# Altium PCB PCB_RAM.PcbDoc
Units mil, origin at the board's own origin, x right, y up, seen from the top; angles counter-clockwise.
Board outline 3440 x 3440 mil, 4 copper layers (Top Signal, PWR, GND, Bottom Signal), stack 23.756 mil thick; 16 components, 94 nets, 32 pads, 4 vias.
Unrouted connection lines stored in the file: 29.
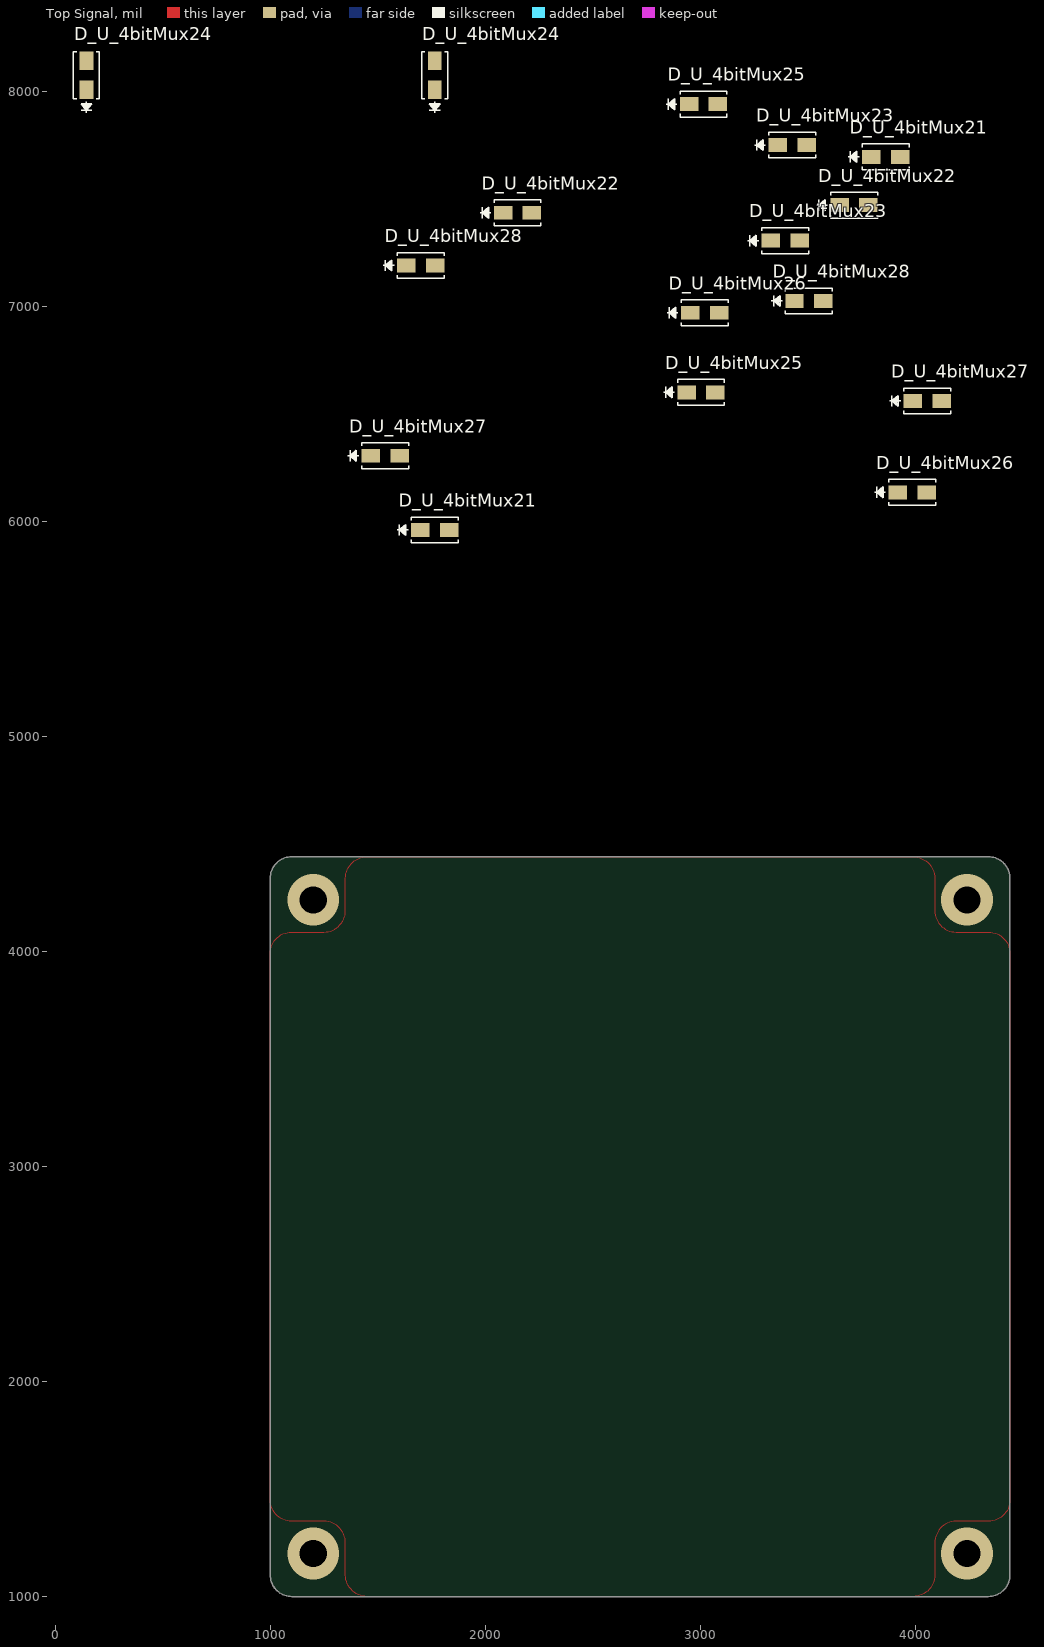
[diagram p0: Top Signal view]
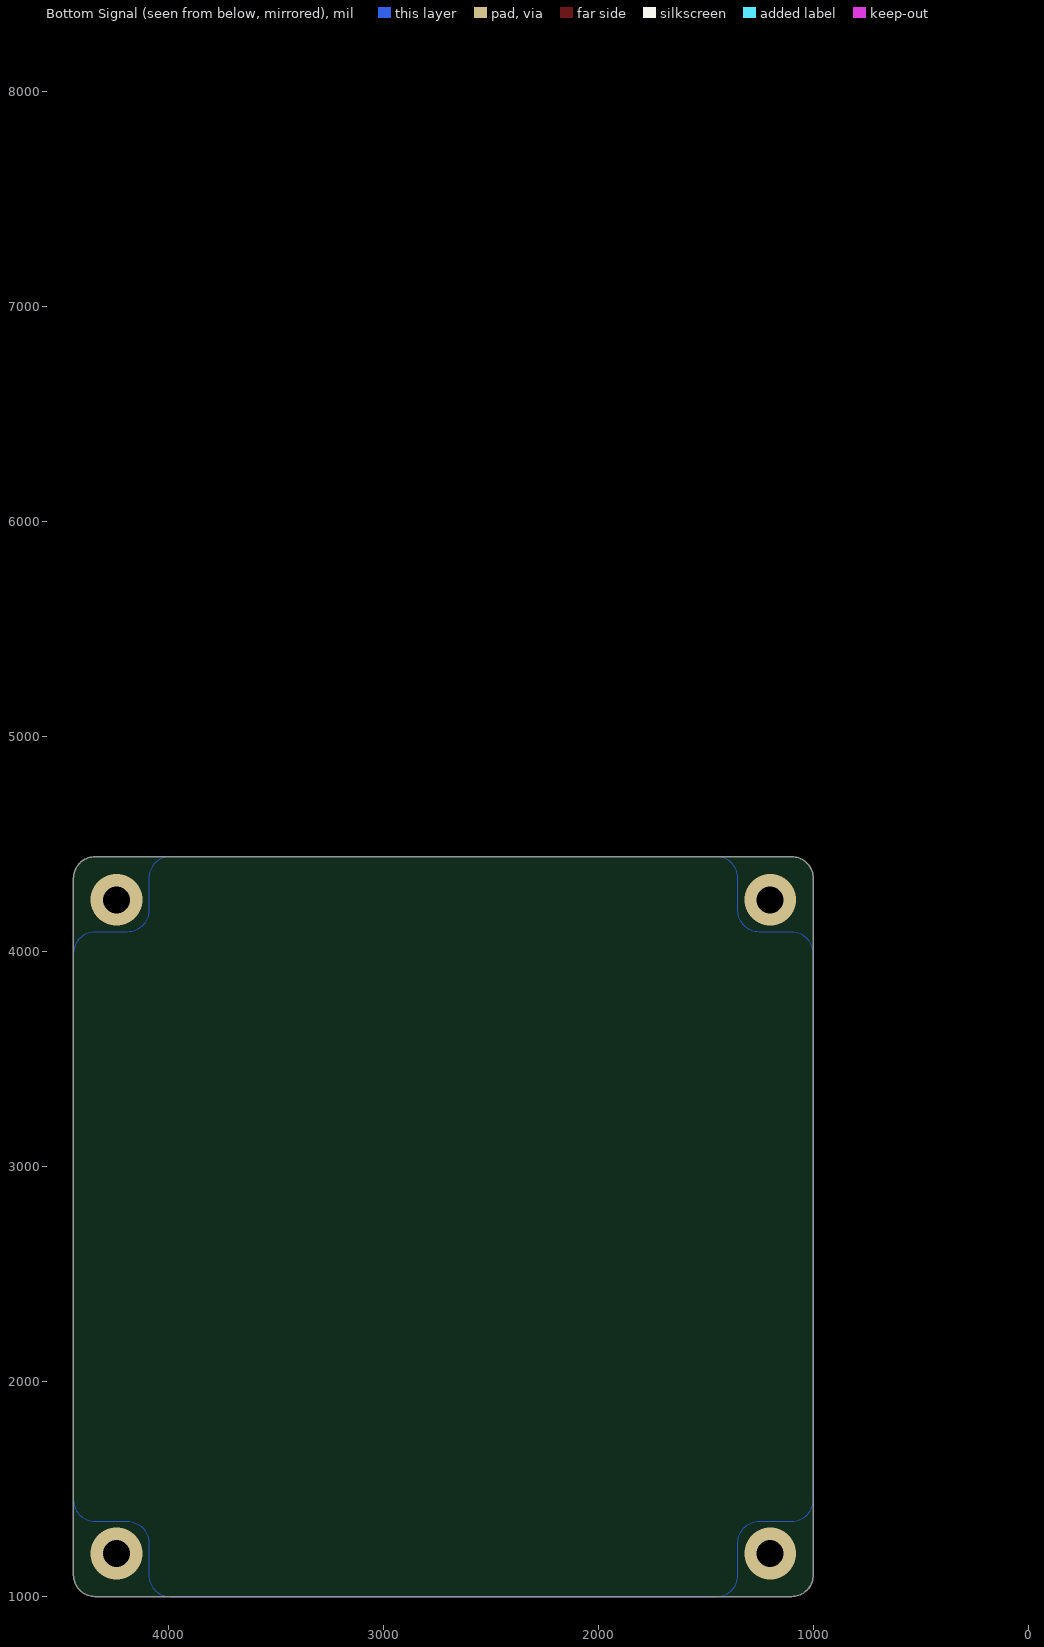
[diagram p1: Bottom Signal view, seen from below]
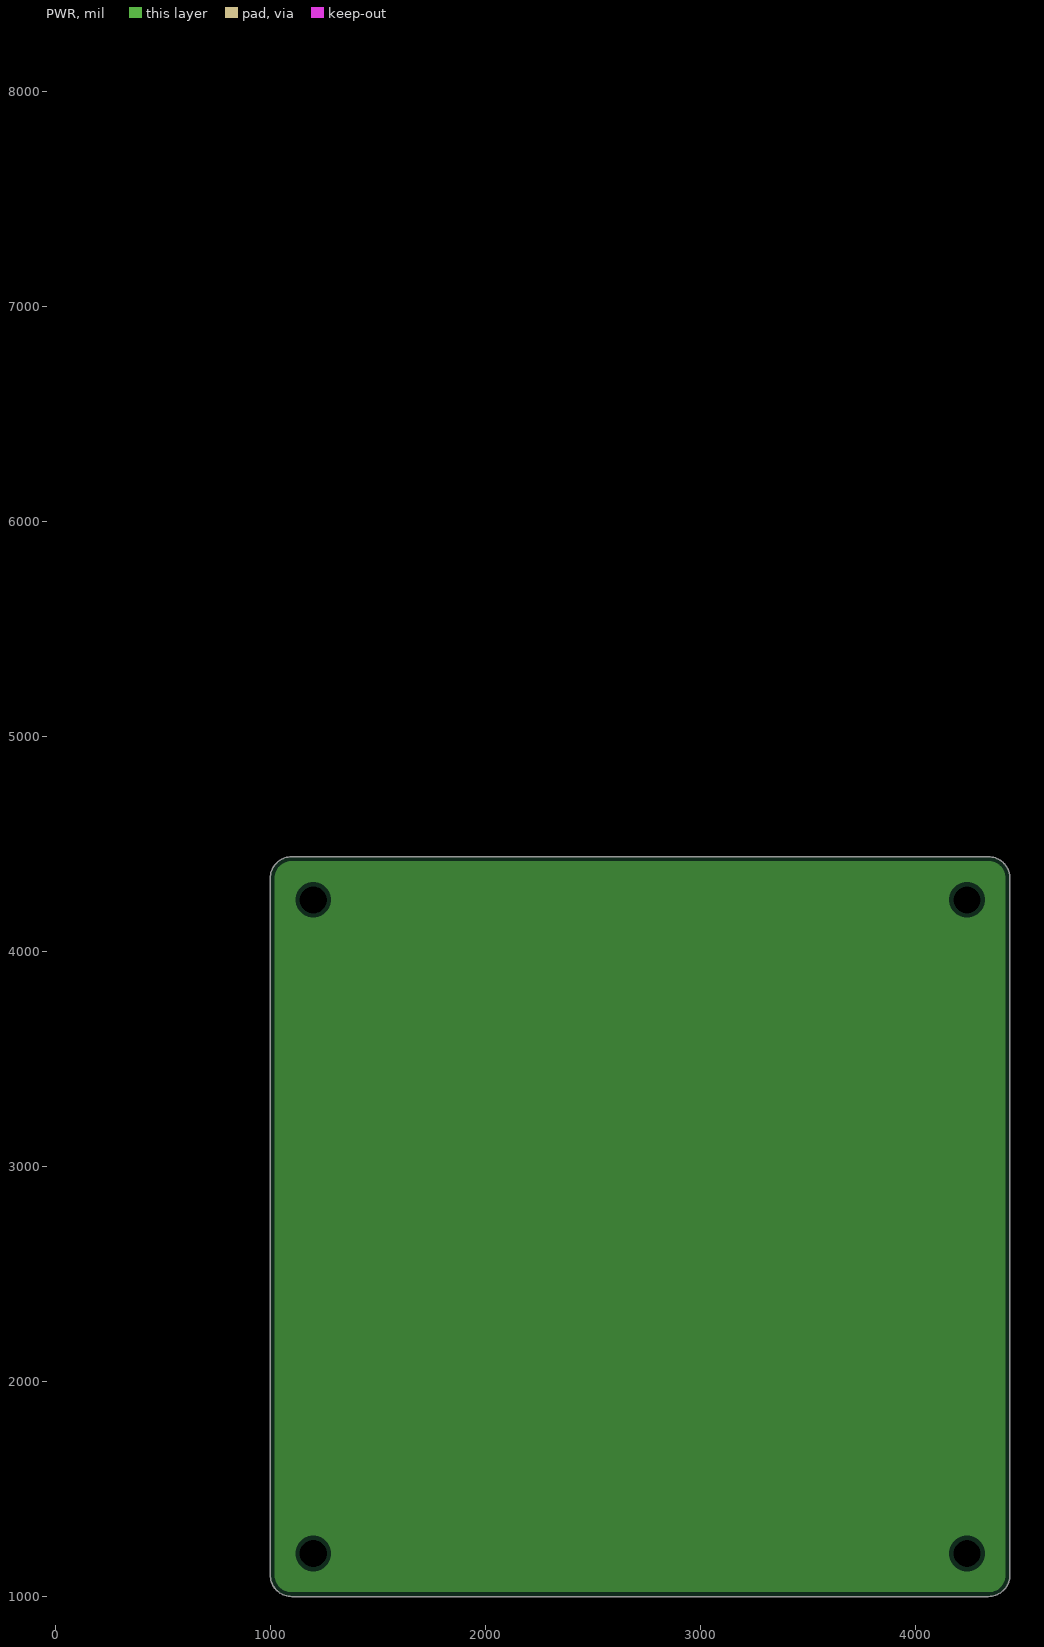
[diagram p2: PWR, clearances drawn from the general rule]
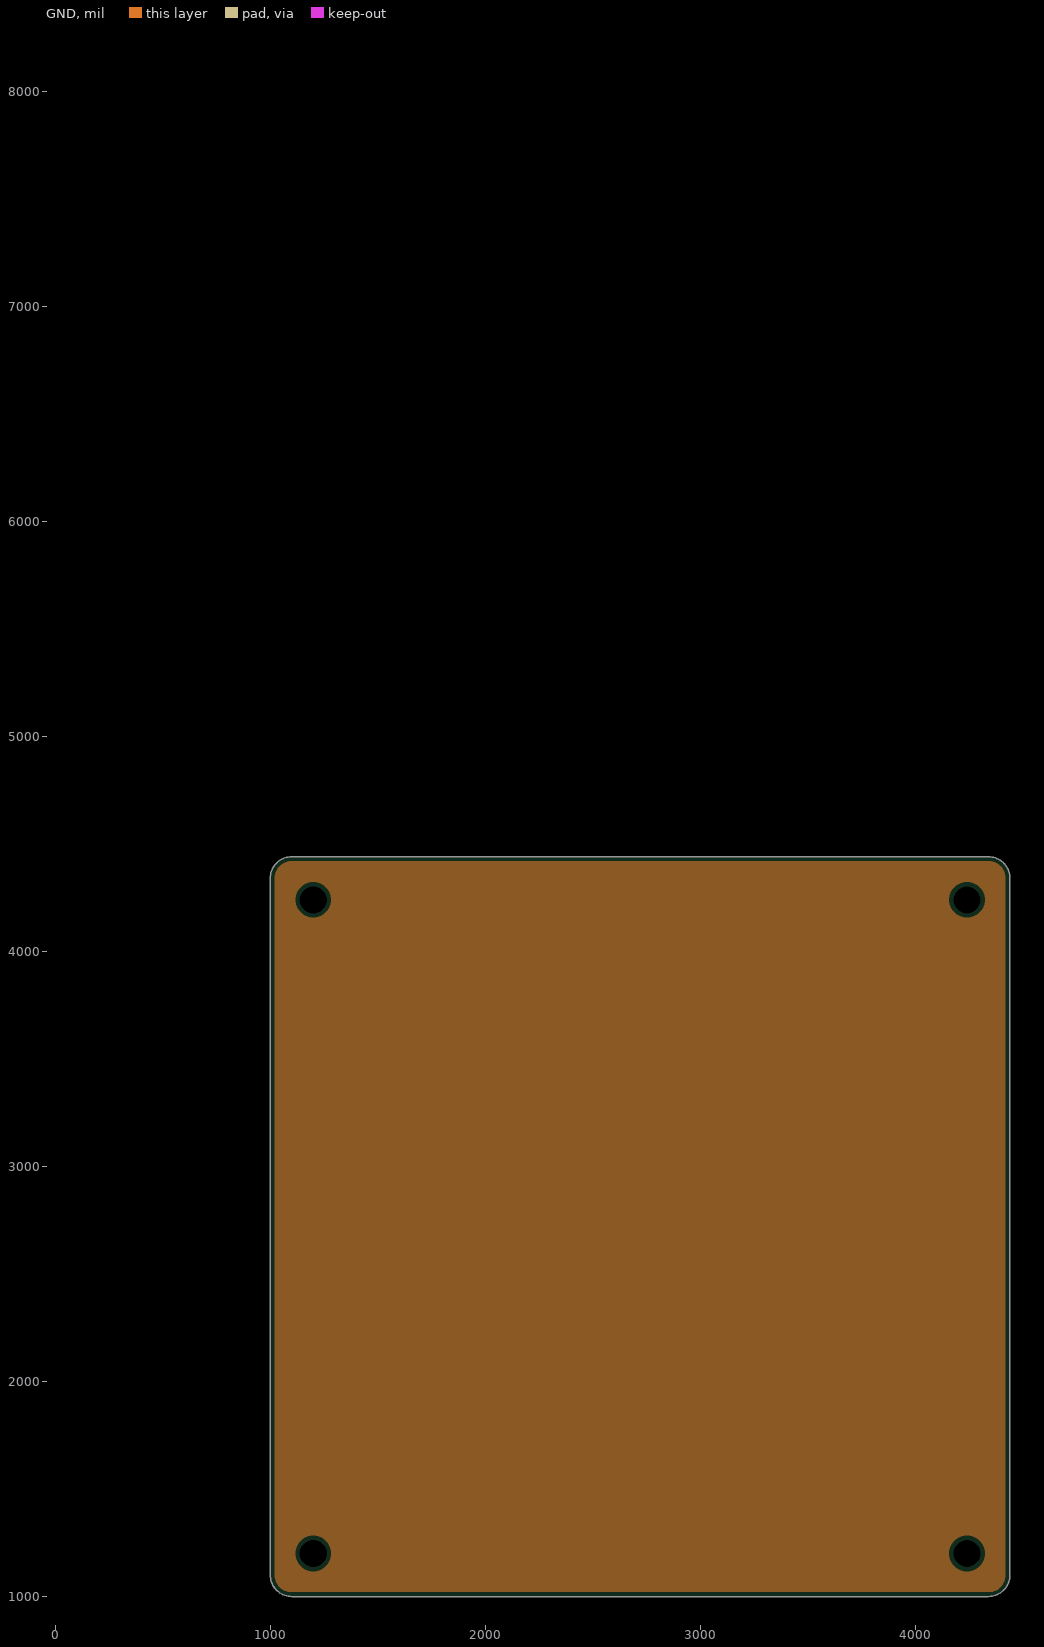
[diagram p3: GND, clearances drawn from the general rule]

## Layer stack, top to bottom
Top Solder: solder mask 0.4, Solder Resist, Dk 3.5
Top Signal: signal copper 1.4
Dielectric 2: prepreg 2.8, PP-006, Dk 4.1
PWR: plane copper 1.378, net +24V
Dielectric 1: dielectric 12.6, FR-4, Dk 4.8
GND: plane copper 1.378, net GND
Dielectric 3: prepreg 2.8, PP-006, Dk 4.1
Bottom Signal: signal copper 1.4
Bottom Solder: solder mask 0.4, Solder Resist, Dk 3.5

## Board outline
1000,4340 cw(c1100,4340) 1100,4440 4340,4440 cw(c4340,4340) 4440,4340 4440,1100 cw(c4340,1100) 4340,1000 1100,1000 cw(c1100,1100) 1000,1100 1000,2825

## Design rules (kind name [scope] priority, off if disabled: settings)
Clearance [All] p1: gap=10 ignorepadtopadclearanceinfootprint=FALSE
PlaneClearance [All] p1: clearance=20
PlaneConnect [All] p1: planeconnectstyle=Relief reliefexpansion=20 reliefentries=4 reliefconductorwidth=10 reliefairgap=10
PolygonConnect [All] p1: connectstyle=Relief reliefconductorwidth=10 reliefentries=4 polygonreliefangle="90 Angle" airgapwidth=10
RoutingVias [All] p1: holewidth=28 width=50 viastyle="Through Hole" minholewidth=28 minwidth=50 maxholewidth=28 maxwidth=50
SolderMaskExpansion [All] p1: expansion=4 istentingtop=FALSE
SupplyNets "Schematic Supply Nets_1" [InNet('GND')] p1: voltage=0.000
SupplyNets "Schematic Supply Nets" [InNet('+24V')] p2: voltage=0.000
Width [All] p1: maxlimit=10 minlimit=10 preferedwidth=10
28 further rules are at their usual default settings.

## Classes and differential pairs
channel class 4bitMux2: U_4bitMux21 U_4bitMux22 U_4bitMux23 U_4bitMux24 U_4bitMux25 U_4bitMux26 U_4bitMux27 U_4bitMux28
component class U_4bitMux28: D_U_4bitMux28
component class U_4bitMux27: D_U_4bitMux27
component class U_4bitMux26: D_U_4bitMux26
component class U_4bitMux25: D_U_4bitMux25
component class U_4bitMux24: D_U_4bitMux24
component class U_4bitMux23: D_U_4bitMux23
component class U_4bitMux22: D_U_4bitMux22
component class U_4bitMux21: D_U_4bitMux21

## Components (designator, comment, footprint, x,y, rotation, side; value= is the part's Value field where it differs from the comment)
D_U_4bitMux21 "SMAJ24A" "DI SMAJ24A" 3862,7695 r0 top value=650pF (schematic designator D)
D_U_4bitMux21 "SMAJ24A" "DI SMAJ24A" 1765,5960 r0 top value=650pF (schematic designator D)
D_U_4bitMux22 "SMAJ24A" "DI SMAJ24A" 3715,7470 r0 top value=650pF (schematic designator D)
D_U_4bitMux22 "SMAJ24A" "DI SMAJ24A" 2150,7435 r0 top value=650pF (schematic designator D)
D_U_4bitMux23 "SMAJ24A" "DI SMAJ24A" 3427,7750 r0 top value=650pF (schematic designator D)
D_U_4bitMux23 "SMAJ24A" "DI SMAJ24A" 3395,7305 r0 top value=650pF (schematic designator D)
D_U_4bitMux24 "SMAJ24A" "DI SMAJ24A" 145,8075 r90 top value=650pF (schematic designator D)
D_U_4bitMux24 "SMAJ24A" "DI SMAJ24A" 1765,8075 r90 top value=650pF (schematic designator D)
D_U_4bitMux25 "SMAJ24A" "DI SMAJ24A" 3003,6600 r0 top value=650pF (schematic designator D)
D_U_4bitMux25 "SMAJ24A" "DI SMAJ24A" 3015,7940 r0 top value=650pF (schematic designator D)
D_U_4bitMux26 "SMAJ24A" "DI SMAJ24A" 3020,6970 r0 top value=650pF (schematic designator D)
D_U_4bitMux26 "SMAJ24A" "DI SMAJ24A" 3985,6135 r0 top value=650pF (schematic designator D)
D_U_4bitMux27 "SMAJ24A" "DI SMAJ24A" 4055,6560 r0 top value=650pF (schematic designator D)
D_U_4bitMux27 "SMAJ24A" "DI SMAJ24A" 1535,6305 r0 top value=650pF (schematic designator D)
D_U_4bitMux28 "SMAJ24A" "DI SMAJ24A" 1700,7190 r0 top value=650pF (schematic designator D)
D_U_4bitMux28 "SMAJ24A" "DI SMAJ24A" 3505,7025 r0 top value=650pF (schematic designator D)

## Footprints (in the part's own frame and the unit in brackets; to place one, negate y for a bottom-side part, rotate by r counter-clockwise, add the part's x,y. Pads: shape width x height; smd on the part's side, far side on the other; paste and mask are expansions set on the pad)
"DI SMAJ24A" [mil]
  rect 86x65 smd paste+0 mask+4: 1(-67,0) 2(67,0)
  silkscreen extent -174,-60 109,60, body extent -104,-55 104,55, height 92

## Part data
D_U_4bitMux21 D_U_4bitMux21 D_U_4bitMux22 D_U_4bitMux22 D_U_4bitMux23 D_U_4bitMux23 D_U_4bitMux24 D_U_4bitMux24 D_U_4bitMux25 D_U_4bitMux25 D_U_4bitMux26 D_U_4bitMux26 D_U_4bitMux27 D_U_4bitMux27 D_U_4bitMux28 D_U_4bitMux28: library part "DI SMAJ24A", "SMAJ Series 400 W 24 V Uni-Directional Surface Mount TVS Diode - DO-214AC", Breakdown Voltage=28.1V, Case/Package=SMA, Clamping Voltage=38.9V, Forward Voltage=3.5V, Leakage Current=1µA, Manufacturer=Littelfuse, Max Breakdown Voltage=29.5V, Max Junction Temperature (Tj)=150°C, Max Output current=10.3A, Max Power Dissipation=3.3W, Min Breakdown Voltage=26.7V, Min Operating Temperature=-65°C, Operating Supply Voltage=24V, Peak Pulse Power=400W, Power Line Protection=No, Supplier Part Number=SMAJ24ALFCT-ND, Test Current=1mA, Category="TVS Diodes", China RoHS=Non-Compliant, ComponentLink1Description=https://datasheet.octopart.com:443/SMAJ24A-Littelfuse-datasheet-150463581.pdf?src-supplier=Farnell, ComponentLink1URL=https://datasheet.octopart.com:443/SMAJ24A-Littelfuse-datasheet-150463581.pdf?src-supplier=Farnell, ComponentLink2Description=https://datasheet.octopart.com:443/SMAJ24A-Littelfuse-datasheet-63710798.pdf?src-supplier=element14+APAC, ComponentLink2URL=https://datasheet.octopart.com:443/SMAJ24A-Littelfuse-datasheet-63710798.pdf?src-supplier=element14+APAC, ComponentLink3Description=https://datasheet.octopart.com:443/SMAJ24A-Littelfuse-datasheet-11547152.pdf?src-supplier=element14+APAC, ComponentLink3URL=https://datasheet.octopart.com:443/SMAJ24A-Littelfuse-datasheet-11547152.pdf?src-supplier=element14+APAC, ComponentLink4Description=https://datasheet.octopart.com:443/SMAJ24A-Littelfuse-datasheet-5393952.pdf?src-supplier=element14+APAC, ComponentLink4URL=https://datasheet.octopart.com:443/SMAJ24A-Littelfuse-datasheet-5393952.pdf?src-supplier=element14+APAC, ComponentLink5Description=https://datasheet.octopart.com:443/SMAJ24A-Littelfuse-datasheet-511791.pdf?src-supplier=element14+APAC, ComponentLink5URL=https://datasheet.octopart.com:443/SMAJ24A-Littelfuse-datasheet-511791.pdf?src-supplier=element14+APAC, ComponentLink6Description=https://datasheet.octopart.com:443/SMAJ24A-Littelfuse-datasheet-164649624.pdf?src-supplier=JRH+Electronics, ComponentLink6URL=https://datasheet.octopart.com:443/SMAJ24A-Littelfuse-datasheet-164649624.pdf?src-supplier=JRH+Electronics, ComponentLink7Description=https://datasheet.octopart.com:443/SMAJ24A-Littelfuse-datasheet-38878911.pdf?src-supplier=RS+(Formerly+Allied+Electronics), ComponentLink7URL=https://datasheet.octopart.com:443/SMAJ24A-Littelfuse-datasheet-38878911.pdf?src-supplier=RS+(Formerly+Allied+Electronics), ComponentLink8Description=https://datasheet.octopart.com:443/SMAJ24A-Littelfuse-datasheet-17901671.pdf?src-supplier=Future+Electronics, ComponentLink8URL=https://datasheet.octopart.com:443/SMAJ24A-Littelfuse-datasheet-17901671.pdf?src-supplier=Future+Electronics, ComponentLink9Description=https://datasheet.octopart.com:443/SMAJ24A-Littelfuse-datasheet-1053.pdf?src-supplier=DigiKey, ComponentLink9URL=https://datasheet.octopart.com:443/SMAJ24A-Littelfuse-datasheet-1053.pdf?src-supplier=DigiKey, Composition=Zener, Direction=Unidirectional, Element Configuration=Single, Height=2.29mm, Lead Free="Lead Free", Length=4.5mm, Lifecycle Status=Production, Manufacturer Part Number=SMAJ24A, Max Operating Temperature=150°C, Max Reverse Leakage Current=1µA, Max Surge Current=10.3A, Mounting Technology="Surface Mount", Number of Channels=1, Number of Elements=1, Number of Terminals=2, Number of Unidirectional Channels=1, Packaging="Tape & Reel", Peak Pulse Current=10.3A, Peak Reverse Current=1µA, Pins=2, Polarity=Unidirectional, Power Dissipation=400W, Power Rating=400W, Pricing="1=0.21, 10=0.113, 100=0.074, 500=0.072, 1000=0.071 (USD)", Radiation Hardening=No, REACH SVHC=No, Reverse Breakdown Voltage=26.7V, Reverse Standoff Voltage=24V, Reverse Voltage=24V, RoHS=Compliant, Schedule B="8541100080, 8541100080|8541100080|8541100080|8541100080|8541100080", Stock=97583, Supplier=DigiKey, Termination=SMD/SMT, Voltage Rating (DC)=24V, Width=2.79mm

## Via types
v1: diameter 240, hole 126, Top Signal to Bottom Signal, 4 vias

## Nets (pads, with @x,y where several pads share a name; then routed paths per layer and width w, separated by ;. In a path a pad name is that pad's centre, name@x,y a point inside that pad or via, vN(x,y) a via of type N, cw(c..) or ccw(c..) an arc to the next point about the centre after c; other vN are vias at no path point)
+24V: 
Ab0: D_U_4bitMux23.1 D_U_4bitMux25.1 D_U_4bitMux27.1 D_U_4bitMux28.1
Ab1: 
Ab2: 
Ab3: 
At0: D_U_4bitMux21.1 D_U_4bitMux22.1 D_U_4bitMux24.1 D_U_4bitMux26.1
At1: 
At2: 
At3: 
CLK: 
GND: D_U_4bitMux21.2 D_U_4bitMux22.2 D_U_4bitMux23.2 D_U_4bitMux24.2 D_U_4bitMux25.2 D_U_4bitMux26.2 D_U_4bitMux27.2 D_U_4bitMux28.2
NetK_U_4bitMux27_2: 
NetK_U_4bitMux27_7: 
r0D0: 
r0D1: 
r0D2: 
r0D3: 
r0LD: 
r0Q0: 
r0Q1: 
r0Q2: 
r0Q3: 
r0r1RDb0: 
r0r1RDb1: 
r0r1RDb2: 
r0r1RDb3: 
r0r1RDt0: 
r0r1RDt1: 
r0r1RDt2: 
r0r1RDt3: 
r1LD: 
r1Q0: 
r1Q1: 
r1Q2: 
r1Q3: 
r2LD: 
r2Q0: 
r2Q1: 
r2Q2: 
r2Q3: 
r2r3RDt0: 
r2r3RDt1: 
r2r3RDt2: 
r2r3RDt3: 
r3LD: 
r3Q0: 
r3Q1: 
r3Q2: 
r3Q3: 
r4LD: 
r4Q0: 
r4Q1: 
r4Q2: 
r4Q3: 
r4r5RDb0: 
r4r5RDb1: 
r4r5RDb2: 
r4r5RDb3: 
r4r5RDt0: 
r4r5RDt1: 
r4r5RDt2: 
r4r5RDt3: 
r5LD: 
r5Q0: 
r5Q1: 
r5Q2: 
r5Q3: 
r6LD: 
r6Q0: 
r6Q1: 
r6Q2: 
r6Q3: 
r6r7RDb0: 
r6r7RDb1: 
r6r7RDb2: 
r6r7RDb3: 
r6r7RDt0: 
r6r7RDt1: 
r6r7RDt2: 
r6r7RDt3: 
r7LD: 
r7Q0: 
r7Q1: 
r7Q2: 
r7Q3: 
RDb0: 
RDb1: 
RDb2: 
RDb3: 
RDt0: 
RDt1: 
RDt2: 
RDt3: 
WE: 
copper on no net:
  other v1: 1200,1200 4240,1200 1200,4240 4240,4240

## Polygon pours and split planes (outlines as drawn)
no net on Bottom Signal "NONET_L04_P000" (solid, shelved, pour order 0): 1000,3990 cw(c1100,3990) 1100,4090 1250,4090 ccw(c1250,4190) 1350,4190 1350,4340 cw(c1450,4340) 1450,4440 3990,4440 cw(c3990,4340) 4090,4340 4090,4190 ccw(c4190,4190) 4190,4090 4340,4090 cw(c4340,3990) 4440,3990 4440,1450 cw(c4340,1450) 4340,1350 4190,1350 ccw(c4190,1250) 4090,1250 4090,1100 cw(c3990,1100) 3990,1000 1450,1000 cw(c1450,1100) 1350,1100 1350,1250 ccw(c1250,1250) 1250,1350 1100,1350 cw(c1100,1450) 1000,1450 1000,2725
no net on Top Signal "NONET_L01_P001" (solid, shelved, pour order 1): 1000,3990 cw(c1100,3990) 1100,4090 1250,4090 ccw(c1250,4190) 1350,4190 1350,4340 cw(c1450,4340) 1450,4440 3990,4440 cw(c3990,4340) 4090,4340 4090,4190 ccw(c4190,4190) 4190,4090 4340,4090 cw(c4340,3990) 4440,3990 4440,1450 cw(c4340,1450) 4340,1350 4190,1350 ccw(c4190,1250) 4090,1250 4090,1100 cw(c3990,1100) 3990,1000 1450,1000 cw(c1450,1100) 1350,1100 1350,1250 ccw(c1250,1250) 1250,1350 1100,1350 cw(c1100,1450) 1000,1450 1000,2725
GND on GND (split plane): 4347.84,4419.61 4355.61,4418.46 4363.22,4416.55 4370.61,4413.91 4377.71,4410.55 4384.44,4406.51 4390.75,4401.84 4396.57,4396.57 4401.84,4390.75 4406.51,4384.44 4410.55,4377.71 4413.91,4370.61 4416.55,4363.22 4418.46,4355.61 4419.61,4347.84 4419.97,4340.63 4419.9,4340 4419.9,1100 4419.97,1099.37 4419.61,1092.16 4418.46,1084.39 4416.55,1076.78 4413.91,1069.39 4410.55,1062.29 4406.51,1055.56 4401.84,1049.25 4396.57,1043.43 4390.75,1038.16 4384.44,1033.49 4377.71,1029.45 4370.61,1026.09 4363.22,1023.45 4355.61,1021.54 4347.84,1020.39 4340.63,1020.03 4340,1020.1 1100,1020.1 1099.37,1020.03 1092.16,1020.39 1084.39,1021.54 1076.78,1023.45 1069.39,1026.09 1062.29,1029.45 1055.56,1033.49 1049.25,1038.16 1043.43,1043.43 1038.16,1049.25 1033.49,1055.56 1029.45,1062.29 1026.09,1069.39 1023.45,1076.78 1021.54,1084.39 1020.39,1092.16 1020.03,1099.37 1020.1,1100 1020.1,2825 1020.1,4340 1020.03,4340.63 1020.39,4347.84 1021.54,4355.61 1023.45,4363.22 1026.09,4370.61 1029.45,4377.71 1033.49,4384.44 1038.16,4390.75 1043.43,4396.57 1049.25,4401.84 1055.56,4406.51 1062.29,4410.55 1069.39,4413.91 1076.78,4416.55 1084.39,4418.46 1092.16,4419.61 1099.37,4419.97 1100,4419.9 4340,4419.9 4340.63,4419.97
+24V on PWR (split plane): 4347.84,4419.61 4355.61,4418.46 4363.22,4416.55 4370.61,4413.91 4377.71,4410.55 4384.44,4406.51 4390.75,4401.84 4396.57,4396.57 4401.84,4390.75 4406.51,4384.44 4410.55,4377.71 4413.91,4370.61 4416.55,4363.22 4418.46,4355.61 4419.61,4347.84 4419.97,4340.63 4419.9,4340 4419.9,1100 4419.97,1099.37 4419.61,1092.16 4418.46,1084.39 4416.55,1076.78 4413.91,1069.39 4410.55,1062.29 4406.51,1055.56 4401.84,1049.25 4396.57,1043.43 4390.75,1038.16 4384.44,1033.49 4377.71,1029.45 4370.61,1026.09 4363.22,1023.45 4355.61,1021.54 4347.84,1020.39 4340.63,1020.03 4340,1020.1 1100,1020.1 1099.37,1020.03 1092.16,1020.39 1084.39,1021.54 1076.78,1023.45 1069.39,1026.09 1062.29,1029.45 1055.56,1033.49 1049.25,1038.16 1043.43,1043.43 1038.16,1049.25 1033.49,1055.56 1029.45,1062.29 1026.09,1069.39 1023.45,1076.78 1021.54,1084.39 1020.39,1092.16 1020.03,1099.37 1020.1,1100 1020.1,2825 1020.1,4340 1020.03,4340.63 1020.39,4347.84 1021.54,4355.61 1023.45,4363.22 1026.09,4370.61 1029.45,4377.71 1033.49,4384.44 1038.16,4390.75 1043.43,4396.57 1049.25,4401.84 1055.56,4406.51 1062.29,4410.55 1069.39,4413.91 1076.78,4416.55 1084.39,4418.46 1092.16,4419.61 1099.37,4419.97 1100,4419.9 4340,4419.9 4340.63,4419.97